# Altium PCB PCB1.PcbDoc
Units mm, origin at the board's own origin, x right, y up, seen from the top; angles counter-clockwise.
Board outline 76.71 x 32.89 mm, 2 copper layers (Top Layer, Bottom Layer); 20 components, 15 nets, 76 pads, 8 vias.
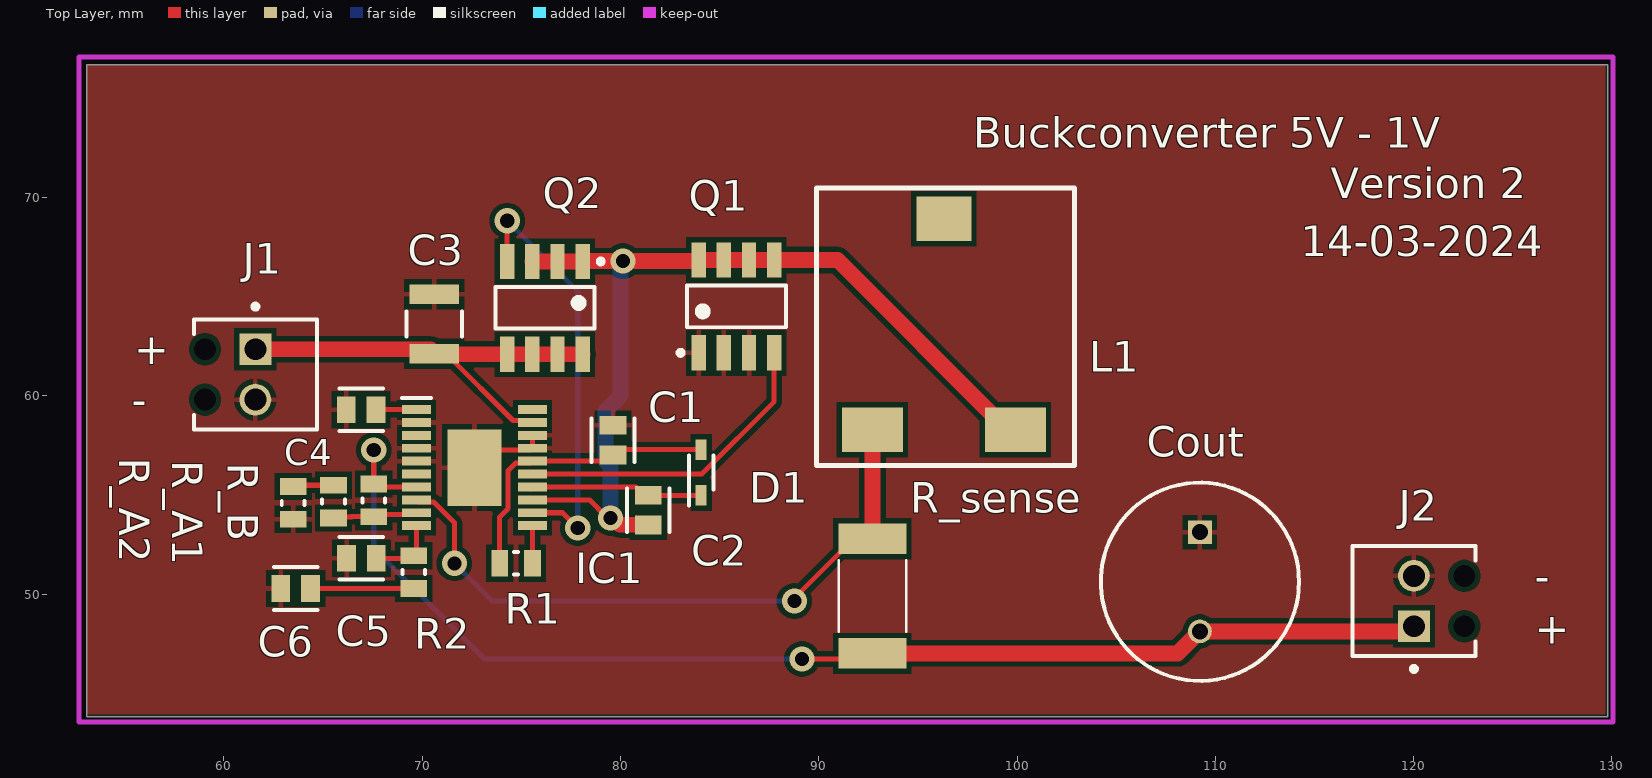
[diagram p0: Top Layer view]
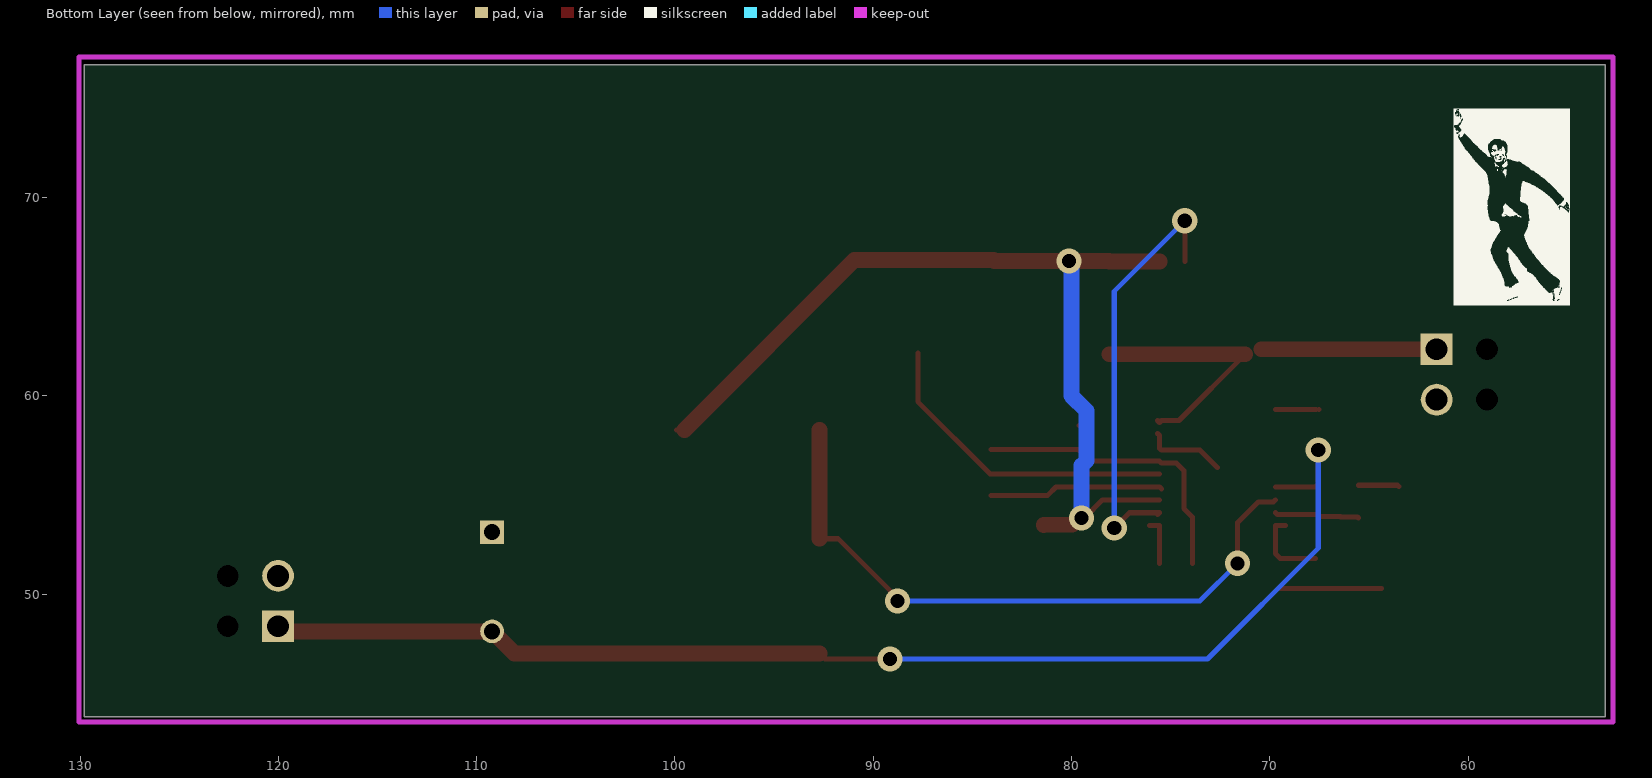
[diagram p1: Bottom Layer view, seen from below]
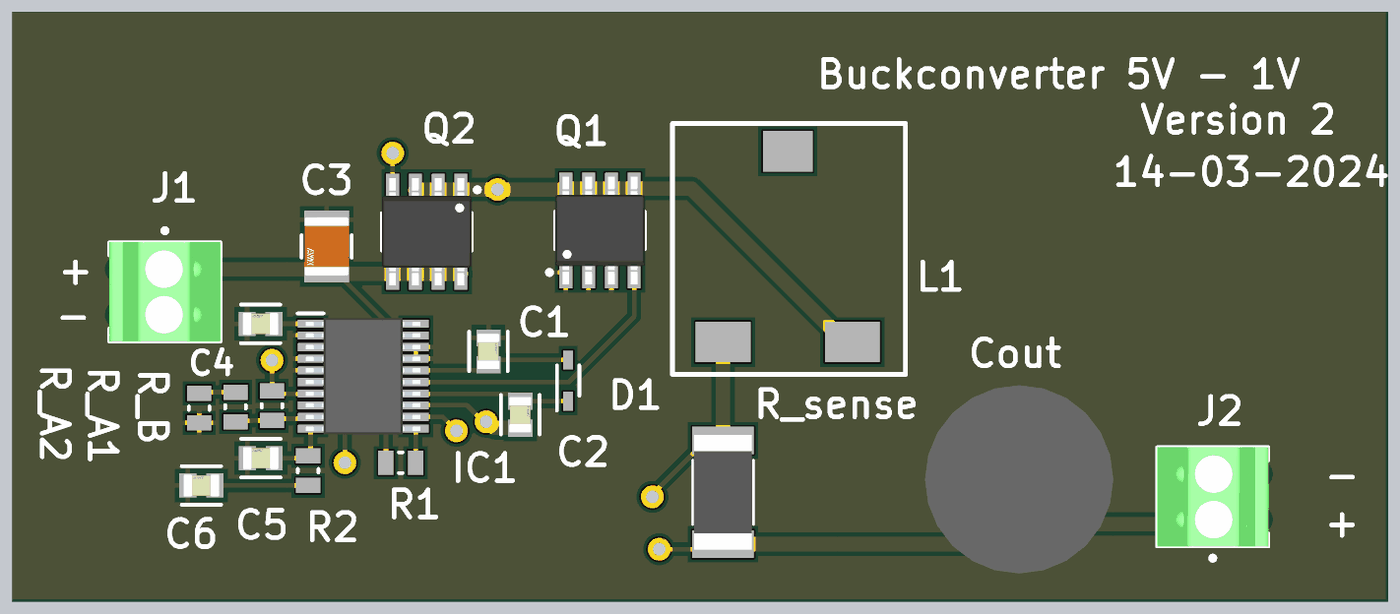
[diagram p2: 3D render of the assembled board from above, using the file's embedded part models]

## Layer stack, top to bottom
Top Solder: solder mask 0.0102, Solder Resist, Dk 3.5
Top Layer: signal copper 0.0356
Dielectric 1: dielectric 0.32, FR-4, Dk 4.8
Bottom Layer: signal copper 0.0356
Bottom Solder: solder mask 0.0102, Solder Resist, Dk 3.5

## Board outline
53.086,43.815 53.086,76.708 129.794,76.708 129.794,43.815

## Design rules (kind name [scope] priority, off if disabled: settings)
Clearance [All] p1: gap=0.254 ignorepadtopadclearanceinfootprint=FALSE except(0: Arc-Hole Track-Hole SMDPad-Hole THPad-Hole Via-Hole Fill-Hole Poly-Hole Region-Hole Text-Hole; 0.127: SMDPad-SMDPad; 0.2: Arc-SMDPad Arc-THPad Track-SMDPad Track-THPad)
PolygonConnect [All] p1: connectstyle=Relief reliefconductorwidth=0.254 reliefentries=4 polygonreliefangle="90 Angle" airgapwidth=0.254
RoutingVias [All] p1: holewidth=0.711 width=1.27 viastyle="Through Hole" minholewidth=0.711 minwidth=1.27 maxholewidth=0.711 maxwidth=1.27
SilkToSolderMaskClearance [IsPad] p1: minsilkscreentomaskgap=0.15 clearancetoexposedcopper=TRUE
SolderMaskExpansion [All] p1: expansion=0.102 istentingtop=FALSE
Width [All] p1: maxlimit=2 minlimit=0.254 preferedwidth=0.254 minimp=50.000000 maximp=50.000000 favimp=50.000000
29 further rules are at their usual default settings.

## Components (designator, comment, footprint, x,y, rotation, side; value= is the part's Value field where it differs from the comment)
C1 "" FP-C0805C-DN-MFG 79.629,57.773 r270 top value="100 pF" (schematic designator C1-2.2u)
C2 "" FP-C0805C-DN-MFG 81.407,54.241 r270 top value="100 pF"
C3 "" FP-1210-L_3_3_0_4-W_2_5_0-MFG 70.612,63.627 r270 top
C4 "" FP-C0805C-DN-MFG 66.929,59.309 r0 top value="100 pF" (schematic designator C4-0.1u)
C5 "" FP-C0805C-DN-MFG 66.941,51.816 r0 top value="100 pF" (schematic designator C5-47p)
C6 "4.7n" FP-C0805C-DN-MFG 63.627,50.292 r0 top value="100 pF" (schematic designator C6-4.7n)
Cout "" CAPPRD500W60D1000H1400 109.22,53.133 r270 top
D1 "" SOD2512X110N 84.074,56.141 r90 top (schematic designator D?)
IC1 "LTC3807IFE#PBF" SOP65P640X120-21N 72.644,56.388 r0 top (schematic designator IC?)
J1 "1725656" PHOE-1725656-2 61.595,61.087 r270 top
J2 "1725656" PHOE-1725656-2 120.015,49.657 r90 top
L1 "Inductor" MtFootprint 99.92,58.293 r90 top
Q1 "IRF7413PBF" INTR-SO-8_V 85.852,64.516 r90 top
Q2 "IRF7413PBF" INTR-SO-8_V 76.193,64.443 r270 top
R1 "" RESC2013X50X30LL20T20 74.74,51.562 r0 top
R2 "" RESC2013X50X30LL20T20 69.578,51.117 r90 top
R_A1 "" RESC2013X50X30LL20T20 65.532,54.673 r270 top
R_A2 "" RESC2013X50X30LL20T20 63.5,54.61 r90 top
R_B "" RESC2013X50X30LL20T20 67.564,54.737 r90 top (schematic designator R_B-10k)
R_sense "" RESC6432X90N 92.71,49.911 r270 top

## Footprints (in the part's own frame and the unit in brackets; to place one, negate y for a bottom-side part, rotate by r counter-clockwise, add the part's x,y. Pads: shape width x height; smd on the part's side, far side on the other; paste and mask are expansions set on the pad)
CAPPRD500W60D1000H1400 [mm]
  rect 1.2x1.2 hole 0.8: 1(0,0)
  round 1.2 hole 0.8: 2(5,0)
  silkscreen extent -2.5,-5 7.5,5, body extent -2.75,-5.24 7.75,5.24, height 14
FP-1210-L_3_3_0_4-W_2_5_0-MFG [mm]
  rect 1x2.5 smd paste+0 mask+0: 1(-1.5,0) 2(1.5,0)
  silkscreen extent -0.63,-1.4 0.63,1.4, body extent -2.1,-1.5 2.1,1.5, height 0.25
FP-C0805C-DN-MFG [mm]
  rect 0.95x1.35 smd paste+0 mask+0: 1(-0.75,0) 2(0.75,0)
  silkscreen extent -1.1,-1.07 1.1,1.07, body extent -1.4,-0.85 1.4,0.85, height 0.25
INTR-SO-8_V [mm] "SOIC, 8-Leads, Body 5x4mm, Pitch 1.27mm"
  rect 1.78x0.72 smd: 1(-2.34,1.905) 2(-2.34,0.635) 3(-2.34,-0.635) 4(-2.34,-1.905) 5(2.34,-1.905) 6(2.34,-0.635) 7(2.34,0.635) 8(2.34,1.905)
  silkscreen extent -2.46,-2.5 1.05,2.94, body extent -3,-2.5 3,2.5, height 1.75
MtFootprint [mm]
  rect 2.26x3.07 smd: 1(0,0) 2(0,7.21)
  rect 2.26x2.77 smd: 3(10.64,3.605)
  silkscreen extent -1.81,-2.97 12.19,10.03
PHOE-1725656-2 [mm] "Connector, 2-Leads, Body 6.2x5.4mm, Pitch 2.54mm"
  rect 1.6x1.6 hole 1.1: 1(-1.27,0)
  round 1.6 hole 1.1: 2(1.27,0)
  round 0 hole 1.1 unplated: MH1(-1.27,-2.54) MH2(1.27,-2.54)
  silkscreen extent -3.54,-3.1 2.77,3.1, body extent -2.77,-3.1 2.77,3.1, height 9
RESC2013X50X30LL20T20 [mm] "Chip Resistor, 2-Leads, Body 2.00x1.25mm, IPC High Density"
  rect 0.85x1.35 smd: 1(-0.825,0) 2(0.825,0)
  silkscreen extent -0.1,-0.58 0.1,0.58, body extent -1.1,-0.72 1.1,0.72, height 0.5
RESC6432X90N [mm]
  rect 1.54x3.42 smd: 1(-2.89,0) 2(2.89,0)
  silkscreen extent -1.8,-1.7 1.8,1.7, body extent -3.2,-1.6 3.2,1.6, height 0.9
SOD2512X110N [mm]
  rect 1.05x0.55 smd: 1(-1.15,0) 2(1.15,0)
  silkscreen extent -1.67,-0.62 0.85,0.62
SOP65P640X120-21N [mm]
  rect 1.45x0.45 smd: 1(-2.925,2.925) 2(-2.925,2.275) 3(-2.925,1.625) 4(-2.925,0.975) 5(-2.925,0.325) 6(-2.925,-0.325) 7(-2.925,-0.975) 8(-2.925,-1.625) 9(-2.925,-2.275) 10(-2.925,-2.925) 11(2.925,-2.925) 12(2.925,-2.275) 13(2.925,-1.625) 14(2.925,-0.975) 15(2.925,-0.325) 16(2.925,0.325) 17(2.925,0.975) 18(2.925,1.625) 19(2.925,2.275) 20(2.925,2.925)
  rect 2.74x3.86 smd: 21(0,0)
  silkscreen extent -3.65,3.5 -2.2,3.5, body extent -3.2,-3.25 3.2,3.25, height 1.2

## Part data
C1 C2 C4 C5 C6: library part CMP-1036-01962-2, "C0805 100 pF C0G 30ppm/°C 5.00% 50 V", Capacitance="100 pF", Manufacturer=KEMET, Manufacturer Part Number=C0805C101J5GAC, Package=C0805C-DN, Temperature="-55°C to +125°C", Temperature Characteristic=C0G, Temperature Coefficient=30ppm/°C, Temperature Range High=+125°C, Temperature Range Low=-55°C, Tolerance=0.05, Voltage Rating="50 V", Automotive=No, Category=Cap, ComponentLink2Description=Datasheet, ComponentLink2URL=https://content.kemet.com/datasheets/KEM_C1003_C0G_SMD.pdf, Device Class L1="Passive Components", Device Class L2=Capacitors, Device Class L3="Ceramic Capacitors", Height=0.88mm, Ipc Land Pattern Name=CAPC200125X78, Lead Free=Yes, Material=Ceramic, Mouser Description="Cap Ceramic 100pF 50V C0G 5% Pad SMD 0805 125C Bulk", Octopart=https://octopart.com/c0805c101j5gac-kemet-1325415, RoHS=TRUE
C3: library part CMP-1038-00766-3, "General Purpose Ceramic Capacitor, 1210, 2.7nF, 5%, NP0, 30ppm/°C, 50V", Capacitance=2.7nF, Case Code (Imperial)=1210, Case Code (Metric)=3225, Dielectric=C0G, Max Operating Temperature=125°C, Min Operating Temperature=-55°C, Package Quantity=4000, Tolerance=5%, Voltage Rating=50V, Case/Package=1210, Construction=Flat, Depth=2.5mm, Dissipation Factor=10%, Height=0.33mm, Length=3.2mm, Mount="Surface Mount", Number of Pins=2, Packaging="Tape and Reel", Radiation Hardening=No, RoHS Compliant=Yes, Series=1210, Termination=SMD/SMT, Thickness=0.037inch, Voltage Rating (DC)=50V, Width=0.098inch
Cout: library part RR71A221MDN1PH, "Capacitor", Manufacturer_Name=Nichicon, Mouser Part Number=647-RR71A221MDN1PH, Datasheet Link=https://no.mouser.com/datasheet/2/293/e_rr7-1919103.pdf, Height=14mm, Manufacturer_Part_Number=RR71A221MDN1PH, Mouser Price/Stock=https://www.mouser.co.uk/ProductDetail/Nichicon/RR71A221MDN1PH?qs=JgOBn5pVFoqscRXN9wfnRw%3D%3D
D1: library part CMDSH2-3_TR_PBFREE, "DIODE SCHOTTKY 30V 200MA SOD323", Manufacturer_Name="Central Semiconductor", Manufacturer_Part_Number="CMDSH2-3 TR PBFREE", Mouser Part Number=610-CMDSH2-3, Datasheet Link=https://my.centralsemi.com/get_document.php?cmp=1&mergetype=pd&mergepath=pd&pdf_id=CMDSH2-3.PDF, Geometry.Height=1.1mm, Mouser Price/Stock=https://www.mouser.co.uk/ProductDetail/Central-Semiconductor/CMDSH2-3-TR-PBFREE?qs=u16ybLDytRa%2FuaZxWATy%2FQ%3D%3D
IC1: "Integrated Circuit", Case/Package=TSSOP, Manufacturer 1="Analog Devices / Linear Technology", Manufacturer_Name="Analog Devices", Max Operating Temperature=125°C, Max Supply Voltage=38V, Min Operating Temperature=-40°C, Min Supply Voltage=4V, Supplier Part Number 1=LTC3807IFE#PBF-ND, Switching Frequency=900kHz, Clock Sync=No, ComponentLink1Description=http://www.linear.com/docs/45333?src-supplier=Digi-Key, ComponentLink1URL=http://www.linear.com/docs/45333?src-supplier=Digi-Key, ComponentLink2Description=http://www.farnell.com/datasheets/1852475.pdf?src-supplier=Element14, ComponentLink2URL=http://www.farnell.com/datasheets/1852475.pdf?src-supplier=Element14, Datasheet Link=https://www.arrow.com/en/products/ltc3807ifepbf/analog-devices, Height=1.2mm, Manufacturer Part Number 1=LTC3807IFE#PBF, Manufacturer_Part_Number=LTC3807IFE#PBF, Max Duty Cycle=99%, Number of Output Phases=1, Number of Outputs=1, Number of Pins=20, Output Configuration=Positive, Packaging=Rail/Tube, Pricing 1="1=6,91000, 25=4,58840, 100=3,79400 (USD)", REACH SVHC="No SVHC", RoHS=Yes, Stock 1=169, Supplier 1=Digi-Key, Synchronous Rectifier=Yes
J1 J2: library part CMP-2000-05299-1, "Male Header, Pitch 2.54 mm, 1 x 2 Position, Height 9 mm, Tail Length 3.5 mm", Colour=Green, Manufacturer="Phoenix Contact", Content=250pc(s), Datasheet URL=http://datasheet.octopart.com/1725656-Phoenix-Contact-datasheet-5302866.pdf, Datasheet Version=Apr-08, Industrial packaging=Yes, Manufacturer part No.=1725656, Manufacturer URL=http://www.phoenixcontact.com/, Number of contacts=2, Pitch=2.54mm, Type=MPT0,5/2-2,54
L1: "General Purpose Inductor, 2.5uH, 20%, 1 Element, Ferrite-Core, SMD, 5039", Case/Size Code=5039, DC Resistance (DCR)=12mR, Inductance-Nom (L)=2.5uH, Inductor Application="POWER INDUCTOR", Inductor Type="GENERAL PURPOSE INDUCTOR", Manufacturer=Bourns, Manufacturer Part Number=SDR1005-2R5ML, Max Current Rating=5.5A, Max Operating Temperature=125°C, Min Operating Temperature=-40°C, Package Height=5mm, Package Length=12.7mm, Package Style=SMTMeter, Package Width=10mm, Self Resonant Frequency=56MHz, Supplier Part Number=SDR1005-2R5MLCT-ND, Test Frequency=1kHz, Tolerance=20%, Category="Fixed Inductors", Channels=1, ComponentLink1Description=https://datasheet.ciiva.com:443/pdfs/VipMasterIC/IC/BOUR/BOUR-S-A0006604481/BOUR-S-A0006604481-1.pdf?src-supplier=IHS+Markit, ComponentLink1URL=https://datasheet.ciiva.com:443/pdfs/VipMasterIC/IC/BOUR/BOUR-S-A0006604481/BOUR-S-A0006604481-1.pdf?src-supplier=IHS+Markit, ComponentLink2Description=https://datasheet.ciiva.com/8515/sdr1005-8515477.pdf?src-supplier=Avnet, ComponentLink2URL=https://datasheet.ciiva.com/8515/sdr1005-8515477.pdf?src-supplier=Avnet, Construction=Rectangular, Core Material=Ferrite, JESD-609 Code=e2, Packaging="Tape and Reel", Pins=2, Pricing="1=0,83, 10=0,714, 25=0,6548, 50=0,5952, 100=0,5297, 250=0,49992 (USD)", Reach SVHC Compliant=Yes, RoHS=Yes, RoHS Compliant=Yes, Shape/Size Description="RECTANGULAR PACKAGE", Shielding=Unshielded, SimulationGenericComponent=True, Stock=579, Supplier=Digikey, Surface Mount=Yes, Terminal Finish=Copper, Terminal Placement="Dual Ended", Termination=Wraparound
Q1 Q2: library part CMP-2000-06466-1, "HEXFET (R) Power MOSFET, 30 V, -55 to 150 degC, 8-Pin SO, RoHS, Tube", Drain-Source On Resistance-Max=0.011O, Drain-to-Source Voltage [Vdss]=30V, Manufacturer="International Rectifier", Package Description="8-Pin Small Outline Integrated Circuit, Body 4.9 x 3.9 mm, Pitch 1.27 mm", Package Reference=SO-8, Rated Power Dissipation=2.5W, Channel Type=N-Channel, Datasheet URL=http://www.infineon.com/dgdl/irf7413pbf.pdf?fileId=5546d462533600a4015355fa8e901bb8, Datasheet Version=02/2008, Manufacturer URL=http://internationalrectifier.com/, Mounting Technology=SurfaceMount, Qg Gate Charge=52nC
R1 R2 R_A1 R_A2 R_B: library part CMP-2001-04896-1, Manufacturer="Vishay Dale", Part Number=CRCW08050000Z0EA
R_sense: library part CRE2512-FZ-R008E-3, "8 mOhms Â±1% 3W Chip Resistor 2512 (6432 Metric) Automotive AEC-Q200, Current Sense, Moisture Resistant Metal Element", Package="6432 Stackpole", Check_prices=https://www.snapeda.com/parts/CRE2512-FZ-R008E-3/Bourns/view-part/984047/?ref=eda, Digi-Key_Part_Number=CRE2512-FZ-R008E-3CT-ND, MF=Bourns, MP=CRE2512-FZ-R008E-3, SnapEDA_Link=https://www.snapeda.com/parts/CRE2512-FZ-R008E-3/Bourns/view-part/984047/?ref=snap

## Via types
v1: diameter 1.27, hole 0.711, Top Layer to Bottom Layer, 8 vias

## Nets (pads, with @x,y where several pads share a name; then routed paths per layer and width w, separated by ;. In a path a pad name is that pad's centre, name@x,y a point inside that pad or via, vN(x,y) a via of type N, cw(c..) or ccw(c..) an arc to the next point about the centre after c; other vN are vias at no path point)
GND: C1.1 C3.1 C4.1 C5.1 C6.1 Cout.1 IC1.2 IC1.4 IC1.5 IC1.17 IC1.18 IC1.21 J1.2 J2.2 Q1.1 Q1.2 Q1.3 R_A2.1 | length 4.8
  Top Layer w0.254: IC1.21 73.521,57.265 75.471,57.265 IC1.17 IC1.18 IC1.18@75.667,58.111 ; C1.1@79.081,58.871 79.429,58.523 C1.1
NetC1_2: C1.2 D1.2 IC1.16 R1.1 | length 15
  Top Layer w0.254: R1.1 73.915,53.897 74.341,54.323 74.341,56.247 74.709,56.615 75.471,56.615 IC1.16 79.093,56.713 79.671,57.291 D1.2
NetC2_1: C2.1 D1.1 IC1.14 | length 8.8
  Top Layer w0.254: IC1.14@75.471,55.315 IC1.14 80.785,55.413 81.207,54.991 C2.1 D1.1
NetC2_2: C2.2 IC1.13 L1.1 Q1.5 Q1.6 Q1.7 Q1.8 Q2.1 Q2.2 Q2.3 | length 47.7
  Top Layer w0.254: IC1.13 78.439,54.763 79.354,53.848 v1(79.502,53.848) ; Q2.1@78.098,66.786 Q2.1@78.114,66.802 ; Q1.8@83.893,66.802 Q1.8 ; L1.1@99.515,58.293 L1.1
  Top Layer w0.8: Q2.3 Q2.2 Q2.1 ; Q2.1@78.114,66.802 v1(80.137,66.802) Q1.8@83.893,66.802 ; v1(79.502,53.848) 79.629,53.848 79.97,53.507 81.391,53.507 C2.2 ; Q1.8 Q1.7 Q1.6 Q1.5 90.952,66.856 L1.1@99.515,58.293
  Bottom Layer w0.254: v1@80.01,66.675 v1(80.137,66.802)
  Bottom Layer w0.8: v1(79.502,53.848) 79.502,56.489 79.248,56.743 79.248,59.256 80.01,60.018 v1@80.01,66.675
NetC3_2: C3.2 IC1.19 J1.1 Q2.5 Q2.6 Q2.7 Q2.8 | length 21.8
  Top Layer w0.254: C3.2@70.433,62.357 70.56,62.484 C3.2@70.612,62.432 ; C3.2@71.245,62.103 74.587,58.761 75.471,58.761 IC1.19 IC1.19@75.667,58.761
  Top Layer w0.8: J1.1 C3.2@70.433,62.357 ; C3.2@71.245,62.103 Q2.5 Q2.6 Q2.7 Q2.8
NetC4_2: C4.2 IC1.1 | length 2
  Top Layer w0.254: C4.2@67.526,59.309 C4.2@67.53,59.313 ; C4.2@67.679,59.313 IC1.1
NetC5_2: C5.2 IC1.10 R2.2 | length 4
  Top Layer w0.254: C5.2 69.487,51.816 69.719,52.048 IC1.10 IC1.10@69.219,53.463
NetC6_2: C6.2 R2.1 | length 5.2
  Top Layer w0.254: C6.2@64.389,50.304 C6.2 R2.1
NetCout_2: Cout.2 IC1.7 J2.1 R_B.2 R_sense.2 | length 64.2
  Top Layer w0.254: R_B.2 67.713,55.413 IC1.7 ; R_B.2@67.564,55.717 v1(67.564,57.277) ; v1(89.154,46.736) 92.425,46.736 R_sense.2 ; J2.1@119.761,48.133 J2.1
  Top Layer w0.8: R_sense.2 108.108,47.021 Cout.2 J2.1@119.761,48.133
  Bottom Layer w0.254: v1(67.564,57.277) 67.564,52.324 73.152,46.736 v1(89.154,46.736)
NetIC?_8: IC1.8 L1.2 R_sense.1 | length 33.2
  Top Layer w0.254: IC1.8 69.817,54.665 70.579,54.665 71.628,53.616 v1(71.628,51.562) ; v1(88.773,49.657) 88.773,49.804 91.77,52.801 R_sense.1
  Top Layer w0.8: R_sense.1 L1.2
  Bottom Layer w0.254: v1(71.628,51.562) 73.533,49.657 v1(88.773,49.657)
NetIC?_9: IC1.9 R_A1.2 R_B.1 | length 4.2
  Top Layer w0.254: R_A1.2 65.586,53.902 66.439,53.902 66.449,53.912 R_B.1 ; R_B.1@67.667,54.015 69.621,54.015 IC1.9
NetIC?_11: IC1.11 R1.2 | length 2.4
  Top Layer w0.254: R1.2 75.569,51.566 IC1.11 IC1.11@76.069,53.463
NetIC?_12: IC1.12 Q2.4 | length 21.8
  Top Layer w0.254: Q2.4 74.292,66.786 74.292,68.831 v1(74.295,68.834) ; IC1.12@75.667,54.015 IC1.12 77.078,54.113 v1(77.851,53.34)
  Bottom Layer w0.254: v1(74.295,68.834) 77.851,65.278 v1(77.851,53.34)
NetIC?_15: IC1.15 Q1.4 | length 16.2
  Top Layer w0.254: IC1.15 84.108,56.063 87.757,59.712 Q1.4
NetR_A1_1: R_A1.1 R_A2.2 | length 2.1
  Top Layer w0.254: R_A2.2 63.563,55.498 R_A1.1
pads on no net: IC1.3 IC1.6 IC1.20 J1.MH1 J1.MH2 J2.MH1 J2.MH2 L1.3

## Polygon pours and split planes (outlines as drawn)
GND on Top Layer "GND_L01_P001" (solid, pour order 1): 130.175,43.307 52.705,43.307 52.705,43.561 52.705,43.688 52.451,77.216 130.302,77.216

## Keep-outs
Keep-Out Layer:
  lines w0.254: 52.705,43.561 52.705,77.089 130.048,77.089 130.048,43.561 52.705,43.561

## Silkscreen, mask and mechanical layers (free items; w line width, h text height)
Top Overlay:
  text "Buckconverter 5V - 1V" at 97.79,72.517 h1.52
  text "Version 2" at 115.824,69.977 h1.52
  text "14-03-2024" at 114.3,67.056 h1.52
  text "+" at 55.499,61.595 h1.52
  text "-" at 55.372,59.055 h1.52
  text "-" at 126.111,50.165 h1.52
  text "+" at 126.111,47.498 h1.52
Bottom Overlay:
  drawing of 20 lines, arcs and shapes, not listed